# EAGLE board standalone_not_autorouted (EAGLE 6.3)
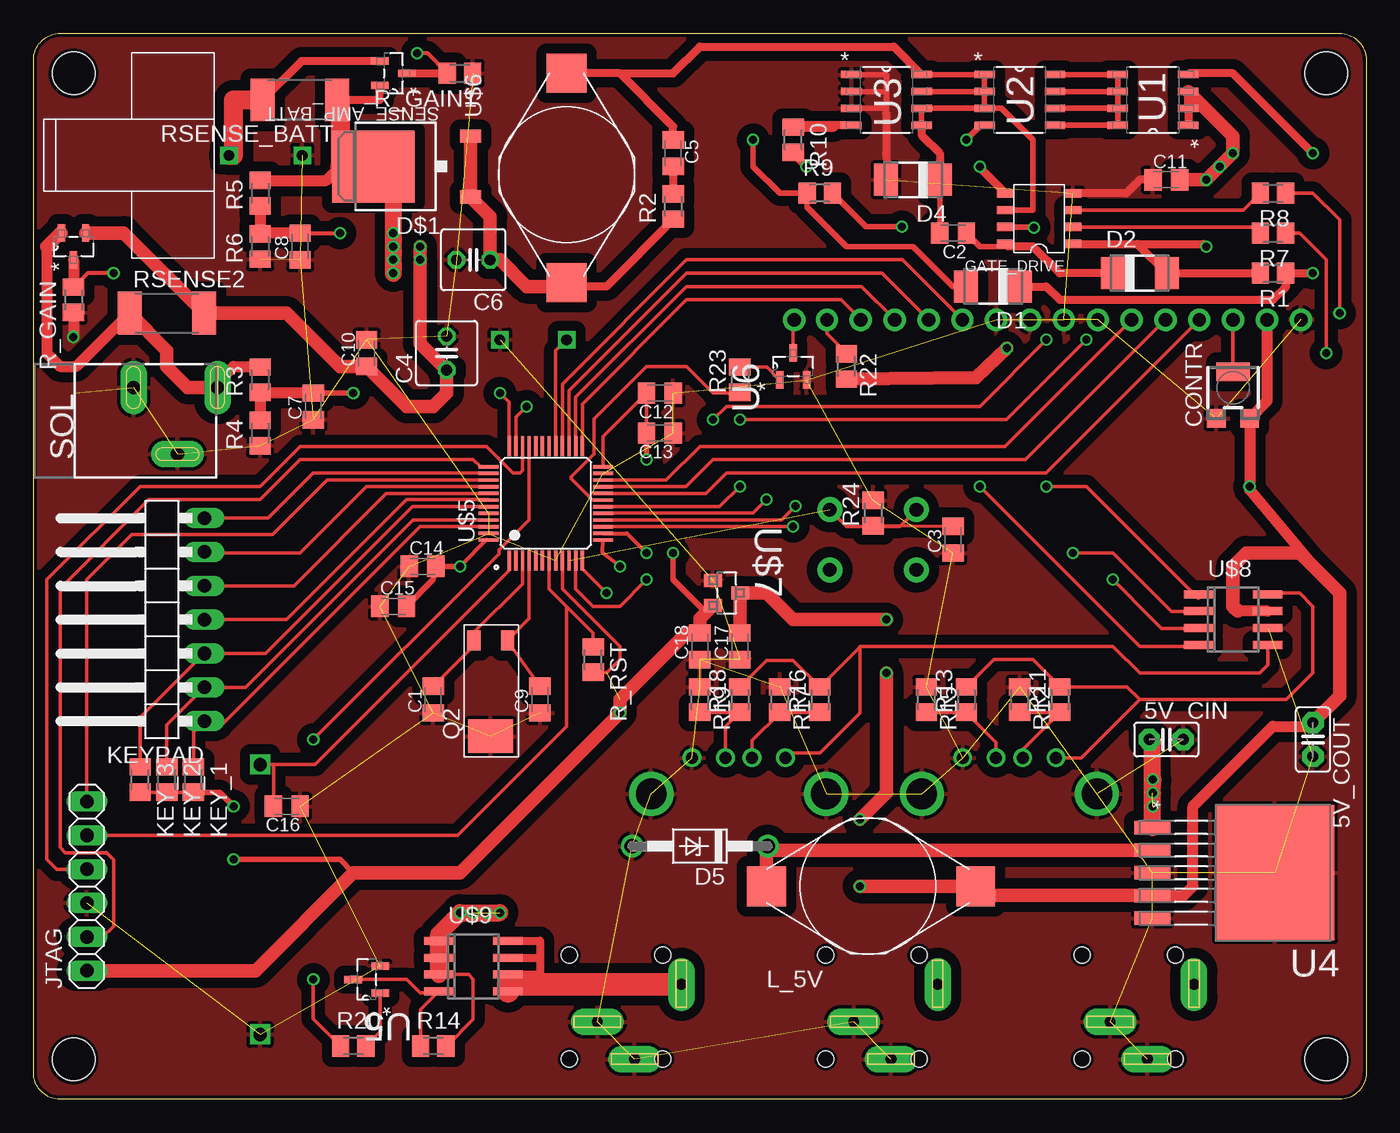
[diagram p0: board, top side]
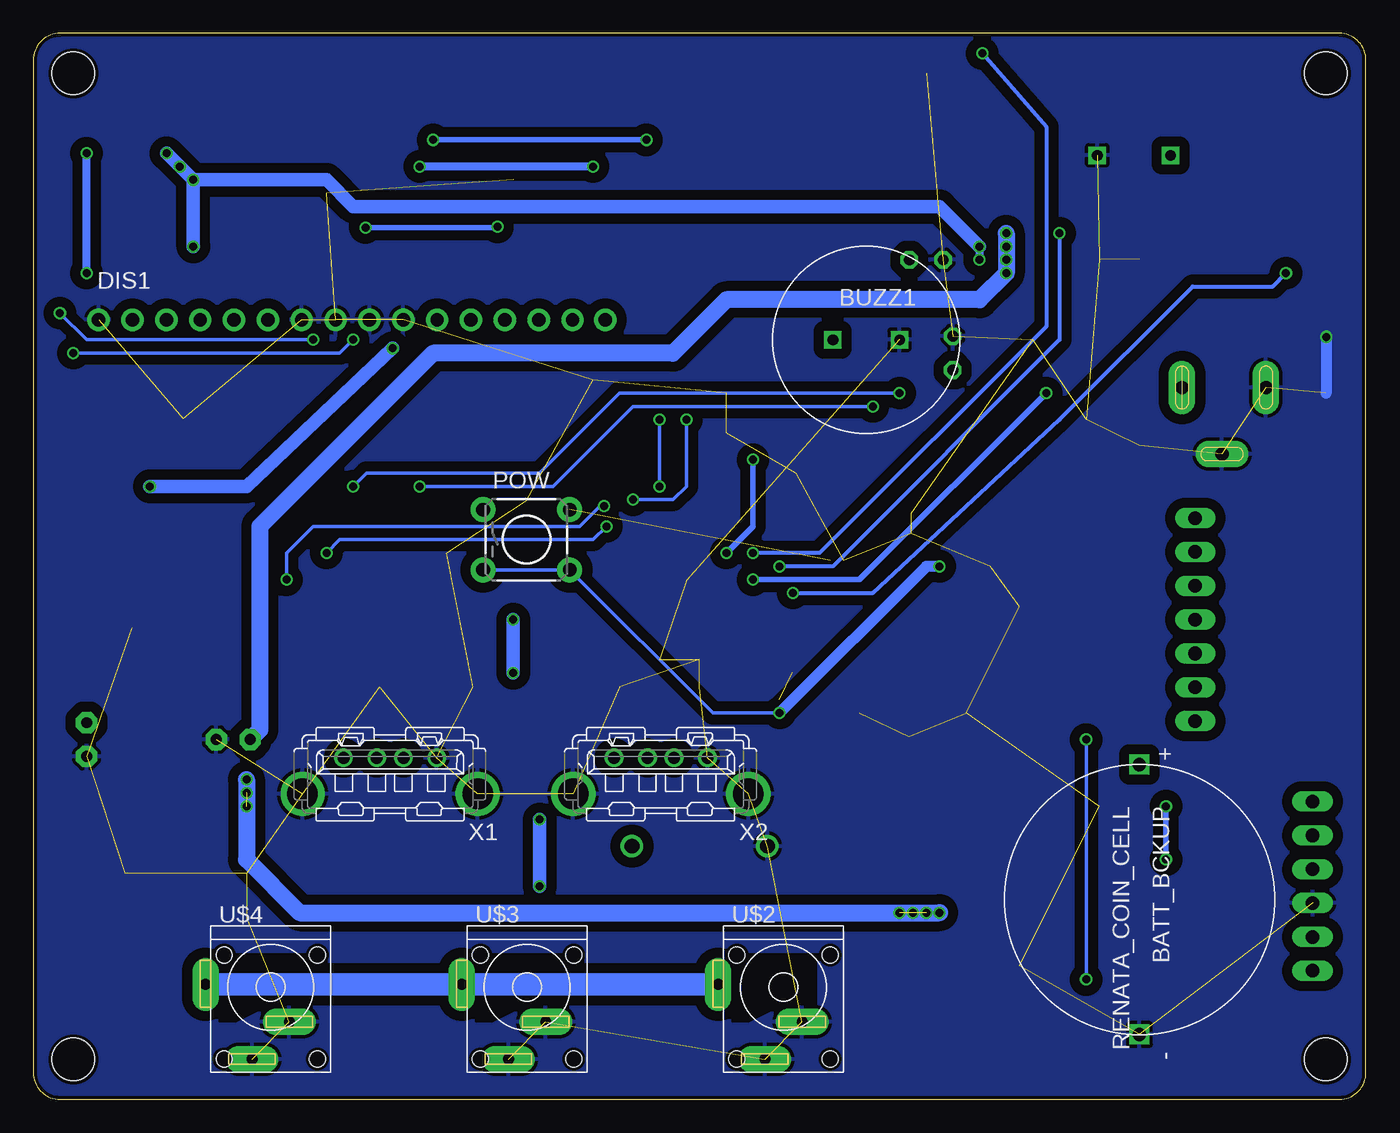
[diagram p1: board, bottom side, seen from below]

Size 100 x 80 mm. Coordinates in mm from the lower left corner, seen from the top.
Outline: 100,78 100,2 arc-90 98,0 2,0 arc-90 0,2 0,78 arc-90 2,80 98,80 arc-90 100,78
Copper layers (1*16): Top 0.035mm / dielectric 1.5mm / Bottom 0.035mm
Design rules "Fusion_eagle_rule_v1.1": minimum track width 6mil, minimum drill 12mil, track to track 6mil, track to pad 6mil, pad to pad 6mil, via to via 6mil, smd to smd 0mil, copper to edge 10mil, drill to drill 10mil, minimum pad ring 10mil, minimum via ring 6mil, stop-mask expansion 2mil, vias tented up to drill 100mil, thermal gap 10mil
Net classes: 0 default: width 0.381 mm, drill 0.61 mm, clearance 0.381 mm; 1 pwr: width 0.026 mm, drill 0.61 mm, clearance 0.762 mm; 2 pow_12v: width 1.372 mm, drill 0.762 mm, clearance 0.762 mm; 3 gnd: width 0.508 mm, drill 0.61 mm
Holes 3.2 mm at 3,77 3,3 97,3 97,77

## Footprints (pad centres in the part's own frame; a part is rotated, then mirrored left to right if it is on the bottom)
C2.5-2 = drill 0.813 pad 1.6 octagon: 1 -1.27,0; 2 1.27,0
MOLEX_39_29_1028 = drill 0.8 square: P$1 0,0; P$2 0,5.5
PANASONIC_CR2032_1298246 = drill 1 square: P+ -10.125,0; P- 10.125,0
14MM_5M_PINS = drill 0.8 square: P$1 -3,0; P$2 2,0
C0805K = smd 1.3 x 1.6: 1 -1,0; 2 1,0
C025-050X050 = drill 0.813 octagon: 1 -1.27,0; 2 1.27,0
RTRIM3304W = smd 1.4 x 1.4: 1 -1.25,-1.9; 3 1.25,-1.9 | smd 2.5 x 1.4: 2 0,1.6
DO-214AC = smd 1.8 x 2.4: A 2.025,0; C -2.025,0
DO41Z10 = drill 1.118: A 5.08,0; C -5.08,0
TO252 = smd 1 x 1.6: 1 -2.28,-4.8; 2 2.28,-4.8 | smd 5.4 x 6.2: 3 0,2.5
LCD_16X2_R2 = drill 1 pad 1.676: 1 8,2.5; 2 10.54,2.5; 3 13.08,2.5; 4 15.62,2.5; 5 18.16,2.5; 6 20.7,2.5; 7 23.24,2.5; 8 25.78,2.5; 9 28.32,2.5; 10 30.86,2.5; 11 33.4,2.5; 12 35.94,2.5; 13 38.48,2.5; 14 41.02,2.5; 15 43.56,2.5; 16 46.01,2.5
IR2104S = smd 1.27 x 0.635: 1 0,3.81; 2 0,2.54; 3 0,1.27; 4 0,0; 5 5.08,0; 6 5.08,1.27; 7 5.08,2.54; 8 5.08,3.81
1X06 = drill 1.016 long: 1 -6.35,0; 2 -3.81,0; 3 -1.27,0; 4 1.27,0; 5 3.81,0; 6 6.35,0
M0805 = smd 1.3 x 1.6: 1 -0.95,0; 2 0.95,0
1X07/90 = drill 1.016 long: 1 -7.62,-3.81; 2 -5.08,-3.81; 3 -2.54,-3.81; 4 0,-3.81; 5 2.54,-3.81; 6 5.08,-3.81; 7 7.62,-3.81
BOURNS_SDR1806 = smd 2.921 x 2.997: P$1 0,0; P$2 15.697,0
TACTILE-PTH = drill 1.016 pad 1.88: 1 -3.251,2.261; 2 3.251,2.261; 3 -3.251,-2.261; 4 3.251,-2.261
CRYSTAL_CMJ206T = smd 2.5 x 3.4: CASE -3.75,-0.3 | smd 1.5 x 1: P$2 3.45,0.97; P$3 3.45,-1.57
R2512 = smd 1.8 x 3.2: 1 -2.8,0; 2 2.8,0
SOT91P240X110-3N = smd 1.321 x 0.559: 1 -1.016,0; 2 1.016,-0.914; 3 1.016,0.914
POWER_JACK_SLOT = drill 1 pad 2 long: GND@1 2.58,7.5; GND@2 7.58,10.8; PWR 2.58,13.8
SOIC127P600X175-8N = smd 1.524 x 0.559: 1 -2.642,1.905; 2 -2.642,0.635; 3 -2.642,-0.635; 4 -2.642,-1.905; 5 2.642,-1.905; 6 2.642,-0.635; 7 2.642,0.635; 8 2.642,1.905
TO170P1435X465-6N = smd 1.016 x 2.692: 1 -3.404,-9.042; 2 -1.702,-9.042; 3 0,-9.042; 4 1.702,-9.042; 5 3.404,-9.042 | smd 10.16 x 8.941: 6 0,0.152
SOT103P240X110-3N = smd 1.321 x 0.559: 1 -1.016,1.016; 2 -1.016,-1.016; 3 1.016,0
KYCON_KLVDX_2020_B = drill 0.813 pad 2 long: 1 -4.845,0.25; 2 -1.345,-5.35; 3 1.455,-2.55 | hole 1.2: 3.555,-5.35; -3.445,-5.35; 3.555,2.45; -3.445,2.45
LQFP48 = smd 1.5 x 0.25: 1 -4.3,2.75; 2 -4.3,2.25; 3 -4.3,1.75; 4 -4.3,1.25; 5 -4.3,0.75; 6 -4.3,0.25; 7 -4.3,-0.25; 8 -4.3,-0.75; 9 -4.3,-1.25; 10 -4.3,-1.75; 11 -4.3,-2.25; 12 -4.3,-2.75; 25 4.3,-2.75; 26 4.3,-2.25; 27 4.3,-1.75; 28 4.3,-1.25; 29 4.3,-0.75; 30 4.3,-0.25; 31 4.3,0.25; 32 4.3,0.75; 33 4.3,1.25; 34 4.3,1.75; 35 4.3,2.25; 36 4.3,2.75 | smd 0.25 x 1.5: 13 -2.75,-4.3; 14 -2.25,-4.3; 15 -1.75,-4.3; 16 -1.25,-4.3; 17 -0.75,-4.3; 18 -0.25,-4.3; 19 0.25,-4.3; 20 0.75,-4.3; 21 1.25,-4.3; 22 1.75,-4.3; 23 2.25,-4.3; 24 2.75,-4.3; 37 2.75,4.3; 38 2.25,4.3; 39 1.75,4.3; 40 1.25,4.3; 41 0.75,4.3; 42 0.25,4.3; 43 -0.25,4.3; 44 -0.75,4.3; 45 -1.25,4.3; 46 -1.75,4.3; 47 -2.25,4.3; 48 -2.75,4.3
SOT95P237X112-3N = smd 0.991 x 1.321: 1 -0.94,-1.016; 2 0.94,-1.016; 3 0,1.016
SO8 = smd 0.6 x 2.2: 1 -1.905,-2.6; 2 -0.635,-2.6; 3 0.635,-2.6; 4 1.905,-2.6; 5 1.905,2.6; 6 0.635,2.6; 7 -0.635,2.6; 8 -1.905,2.6
KUSBVX = drill 0.9 pad 1.3: 1 3.5,0; 2 1,0; 3 -1,0; 4 -3.5,0 | drill 2.3 pad 2.8: M1 -6.57,2.71; M2 6.57,2.71

## Placement (x,y rotation side)
5V_CIN  100u  [C2.5-2]  85,27 0 top
5V_COUT  330u  [C2.5-2]  96,27 270 top
BATT  CON_MOLEX_39_29_1028  [MOLEX_39_29_1028]  14.66,70.84 270 top
BATT_BCKUP  RENATA_COIN_CELL  [PANASONIC_CR2032_1298246]  17,15 270 bottom
BUZZ1  BUZZ_14MM  [14MM_5M_PINS]  37,57 0 bottom
C1  12.5pF  [C0805K]  30,30 90 top
C2  1uF  [C0805K]  69,65 180 top
C3  100nF  [C0805K]  69,42 90 top
C4  100uF  [C025-050X050]  31,56 90 top
C5  0.1uF  [C0805K]  48,71 270 top
C6  220uF  [C025-050X050]  33,63 180 top
C7  0.1uF  [C0805K]  21,52 90 top
C8  0.1uF  [C0805K]  20,64 90 top
C9  12.5pF  [C0805K]  38,30 90 top
C10  1uF  [C0805K]  25,56 90 top
C11  1uF  [C0805K]  85,69 0 top
C12  1uF  [C0805K]  47,53 180 top
C13  100nF  [C0805K]  47,50 180 top
C14  100nF  [C0805K]  29.19,40 0 top
C15  100nF  [C0805K]  27,37 0 top
C16  1uF  [C0805K]  19,22 180 top
C17  1uF  [C0805K]  53,34 90 top
C18  1uF  [C0805K]  50,34 90 top
CONTR  10K  [RTRIM3304W]  90,53 0 top
D1  S1A-E3/5AT  [DO-214AC]  72,61 180 top
D2  S1A-E3/5AT  [DO-214AC]  83,62 0 top
D4  US1D - 1625280  [DO-214AC]  66,69 180 top
D5  [DO41Z10]  50,19 180 top
D$1  [TO252]  28,70 90 top
DIS1  LCD_16X2_R2  [LCD_16X2_R2]  103.1,56 0 bottom
GATE_DRIVE  IR2104S  [IR2104S]  78,68 180 top
JTAG  [1X06]  4,16 90 top
KEY_1  10K  [M0805]  12,24 270 top
KEY_2  10K  [M0805]  10,24 270 top
KEY_3  10K  [M0805]  8,24 270 top
KEYPAD  [1X07/90]  9,36 90 top
L_5V  330uF  [BOURNS_SDR1806]  55,16 0 top
POW  [TACTILE-PTH]  63,42 0 bottom
Q2  32.768khz  [CRYSTAL_CMJ206T]  34,31 90 top
R1  470K  [M0805]  93,62 180 top
R2  200  [M0805]  48,67 90 top
R3  10K  [M0805]  17,54 90 top
R4  1.32k  [M0805]  17,50 90 top
R5  10K  [M0805]  17,68 90 top
R6  1.32k  [M0805]  17,64 90 top
R7  200  [M0805]  93,65 180 top
R8  200  [M0805]  93,68 180 top
R9  5  [M0805]  59,68 0 top
R10  5  [M0805]  57,72 270 top
R11  75k  [M0805]  77,30 90 top
R12  49.9k  [M0805]  74,30 270 top
R13  75k  [M0805]  70,30 90 top
R14  100K  [M0805]  30,4 0 top
R15  49.9k  [M0805]  67,30 270 top
R16  75k  [M0805]  59,30 90 top
R17  49.9k  [M0805]  56,30 270 top
R18  75k  [M0805]  53,30 90 top
R19  49.9k  [M0805]  50,30 270 top
R20  1k  [M0805]  24,4 0 top
R22  0R  [M0805]  61,55 270 top
R23  1k  [M0805]  53,54 90 top
R24  1k  [M0805]  63,44 90 top
R_GAIN  10K  [M0805]  3,60 90 top
R_GAIN1  10K  [M0805]  32,77 180 top
R_RST  100K  [M0805]  42,33 270 top
RSENSE2  0.005  [R2512]  10,59 0 top
RSENSE_BATT  0.005  [R2512]  20,75 180 top
SENSE_AMP_BATT  ZXCT1107SA-7  [SOT91P240X110-3N]  27,77 180 top
SENSE_AMP_SOL  ZXCT1107SA-7  [SOT91P240X110-3N]  3,64 90 top
SOL  POWER_JACK_2.1MMSLT  [POWER_JACK_SLOT]  0,56 270 top
U1  DMS3016SSS-13  [SOIC127P600X175-8N]  84,75 180 top
U2  DMS3016SSS-13  [SOIC127P600X175-8N]  74,75 0 top
U3  DMS3016SSS-13  [SOIC127P600X175-8N]  64,75 0 top
U4  LM2575S-15  [TO170P1435X465-6N]  93,17 270 top
U5  NMOS_2N7002  [SOT103P240X110-3N]  25,9 180 top
U6  NMOS_2N7002  [SOT103P240X110-3N]  57,55 90 top
U$1  EQUINOX_LOGO_LARGE  [EQUINOX_LOGO_LARGE]  28.29,16.87 0 top
U$2  KYCON_KLDVX-0202  [KYCON_KLVDX_2020_B]  43.76,8.37 0 bottom
U$3  KYCON_KLDVX-0202  [KYCON_KLVDX_2020_B]  63,8.37 0 bottom
U$4  KYCON_KLDVX-0202  [KYCON_KLVDX_2020_B]  82.24,8.37 0 bottom
U$5  STM32F050C6T6A  [LQFP48]  38.44,44.72 90 top
U$6  330uF  [BOURNS_SDR1806]  40,77 270 top
U$7  MCP1700T-3302E/TT  [SOT95P237X112-3N]  52,38 270 top
U$8  AP1212  [SO8]  90,36 270 top
U$9  PMOS_RSS090P03  [SO8]  33,10 270 top
X1  KUSBVX  [KUSBVX]  73.23,25.63 180 bottom
X2  KUSBVX  [KUSBVX]  52.92,25.63 180 bottom

## Library data of the parts
5V_CIN 5V_COUT = capacitor-wima; AUTHOR: Ashley Grealish; VERSION: 0.1
BATT D$1 GATE_DRIVE POW Q2 SOL U$1-U$5 U$8 = equinox
BATT_BCKUP = coin_cells
BUZZ1 = buzzer; AUTHOR: Ashley Grealish; VERSION: 0.1
C1 C3 C9 C12-C18 R22-R24 = resistor; AUTHOR: Ashley Grealish; VERSION: 0.1
C2 C4-C8 C10 C11 CONTR R11-R13 R15-R19 = resistor
D1 D2 D4 = diode
D5 = diode; AUTHOR: Ashley Grealish; VERSION: 0.1
DIS1 = equinox; OC_FARNELL: unknown; OC_NEWARK: unknown
JTAG KEYPAD = pinhead
KEY_1-KEY_3 R14 R20 R_RST = rcl; AUTHOR: Ashley Grealish; VERSION: 0.1
L_5V = lib; AUTHOR: Ashley Grealish; VERSION: 0.1
R1-R10 R_GAIN R_GAIN1 RSENSE2 RSENSE_BATT = rcl
SENSE_AMP_BATT SENSE_AMP_SOL = equinox; MPN: ZXCT1107SA-7; OC_FARNELL: 1904027; OC_NEWARK: 55T4047; PACKAGE: SOT-23-3; SUPPLIER: DIODES INC.
U1-U3 = equinox; MPN: DMS3016SSS-13; OC_FARNELL: 1863729; OC_NEWARK: 27T2704; PACKAGE: SOIC-8; SUPPLIER: DIODES INC.
U4 = equinox; MPN: LM2575S-15; OC_FARNELL: 1798356; OC_NEWARK: 75R2093; PACKAGE: TO-263-5; SUPPLIER: National
U5 = equinox; MPN: 2N7002-7-F; OC_FARNELL: 1713823; OC_NEWARK: 25R5679; PACKAGE: SOT-23-3; SUPPLIER: DIODES INC.
U6 = equinox; AUTHOR: Ashley Grealish; MPN: 2N7002-7-F; OC_FARNELL: 1713823; OC_NEWARK: 25R5679; PACKAGE: SOT-23-3; SUPPLIER: DIODES INC.; VERSION: 0.1
U$6 = lib
U$7 = equinox; MPN: MCP1700T-3302E/TT; OC_FARNELL: 1296592; OC_NEWARK: 88H9817; PACKAGE: SOT23-3; SUPPLIER: Microchip
U$9 = equinox; FARNELL: 1525544
X1 X2 = con-kycon

## Nets
12V_OUT [pow_12v]: U$2.1 U$3.1 U$4.1 U$9.5 U$9.6 U$9.7 U$9.8
12V_OUT_EN: R20.1 U$5.33
+3V3: C12.2 C13.2 C14.2 C15.2 C18.2 JTAG.1 KEY_1.2 KEY_2.2 KEY_3.2 POW.3 POW.4 R_RST.2 U$5.9 U$5.24 U$5.48 U$7.2
+5V: 5V_COUT.1 C17.2 CONTR.3 DIS1.2 L_5V.P$2 R22.2 U4.4 U$7.3 U$8.7
BATT_I: R_GAIN1.2 SENSE_AMP_BATT.1 U$5.14
BATT_V: C8.2 R5.1 R6.2 U$5.13
CC_PWM: R7.1 U$5.17
CC_~EN: R8.1 U$5.18
GND [pwr]: 5V_CIN.2 5V_COUT.2 BATT.P$2 BATT_BCKUP.P- BUZZ1.P$2 C1.1 C3.1 C4.2 C6.2 C7.1 C8.1 C9.1 C10.2 C11.1 C12.1 C13.1 C14.1 C15.1 C16.1 C17.1 C18.1 CONTR.1 D4.A D5.A DIS1.1 DIS1.7 DIS1.8 DIS1.9 DIS1.10 GATE_DRIVE.4 JTAG.3 Q2.CASE R4.1 R6.1 R12.1 R15.1 R17.1 R19.1 R24.2 R_GAIN1.1 R_GAIN.1 SOL.GND@1 SOL.GND@2 U3.1 U3.2 U3.3 U4.3 U4.5 U4.6 U5.2 U6.2 U$2.2 U$2.3 U$3.2 U$3.3 U$4.2 U$4.3 U$5.8 U$5.23 U$5.44 U$5.47 U$7.1 U$8.6 X1.4 X1.M1 X1.M2 X2.4 X2.M1 X2.M2
LCD_BK_EN: R23.1 U$5.19
LCD_D4: DIS1.11 U$5.28
LCD_D5: DIS1.12 U$5.27
LCD_D6: DIS1.13 U$5.26
LCD_D7: DIS1.14 U$5.25
LCD_E: DIS1.6 U$5.22
LCD_RS: DIS1.4 U$5.20
LCD_RW: DIS1.5 U$5.21
N$1: C1.2 Q2.P$2 U$5.3
N$2: CONTR.2 DIS1.3
N$3: GATE_DRIVE.3 R8.2
N$4 [pwr]: BATT.P$1 RSENSE_BATT.2 SENSE_AMP_BATT.2
N$5: D1.C R1.1 U1.4
N$6 [pwr]: C2.2 C5.1 D4.C GATE_DRIVE.6 U2.1 U2.2 U2.3 U3.5 U3.6 U3.7 U3.8 U$6.P$1
N$7: GATE_DRIVE.7 R9.2
N$8: GATE_DRIVE.2 R7.2
N$9 [pwr]: C4.1 C10.1 C11.2 D2.A GATE_DRIVE.1 R1.2 RSENSE2.2 SENSE_AMP_SOL.2 U1.1 U1.2 U1.3
N$10: C2.1 D2.C GATE_DRIVE.8
N$11: R10.1 U3.4
N$12: C6.1 D$1.1 D$1.2 R2.1 U$6.P$2
N$13: GATE_DRIVE.5 R10.2
N$14: D1.A R9.1 U2.4
N$15: C5.2 R2.2
N$16 [pwr]: R3.2 RSENSE2.1 SENSE_AMP_SOL.3 SOL.PWR
N$17 [pwr]: U1.5 U1.6 U1.7 U1.8 U2.5 U2.6 U2.7 U2.8
N$18: C9.2 Q2.P$3 U$5.4
N$19: DIS1.15 R22.1
N$20: R16.1 R17.2 X2.2
N$21: D5.C L_5V.P$1 U4.2
N$22: BUZZ1.P$1 U$5.29
N$23: KEY_1.1 KEYPAD.1 U$5.46
N$24: KEY_2.1 KEYPAD.2 U$5.45
N$25: R14.1 U5.3 U$9.4
N$26: KEY_3.1 KEYPAD.3 U$5.43
N$27: KEYPAD.4 U$5.42
N$28: KEYPAD.5 U$5.41
N$29: KEYPAD.6 U$5.40
N$30: KEYPAD.7 U$5.38
N$31: DIS1.16 U6.3
N$32: R23.2 U6.1
N$33: R11.1 R12.2 X1.2
N$34: R13.1 R15.2 X1.3
N$35: R20.2 U5.1
N$36: R18.1 R19.2 X2.3
NRST: JTAG.5 R_RST.1 U$5.7
SOL_I: R_GAIN.2 SENSE_AMP_SOL.1 U$5.12
SOL_V: C7.2 R3.1 R4.2 U$5.11
SWCLK: JTAG.2 U$5.37
SWDIO: JTAG.4 U$5.34
SWO: JTAG.6 U$5.39
USART1_RX: U$5.31
USART1_TX: U$5.30
USB_EN1: U$5.36 U$8.1
USB_EN2: U$5.35 U$8.4
USB_FLG1: U$5.15 U$8.2
USB_FLG2: U$5.16 U$8.3
USB_OUT1 [pwr]: R11.2 R13.2 U$8.8 X1.1
USB_OUT2 [pwr]: R16.2 R18.2 U$8.5 X2.1
V_BACKUP: BATT_BCKUP.P+ C16.2 U$5.1
V_LOAD: 5V_CIN.1 D$1.3 R5.2 R14.2 RSENSE_BATT.1 SENSE_AMP_BATT.3 U4.1 U$9.1 U$9.2 U$9.3
WKUP: C3.2 POW.1 POW.2 R24.1 U$5.10

## Tracks (layer width: path | path; a pad name or v marks a point on that pad's centre or on a via)
12V_OUT
  Top 0.61: U$9.6 38,9.37 | U$9.7 38,10.63 | 38,10.63 38,9.37 | U$9.8 38,11.9 38,10.63 | 38,9.37 38,8.62
  Top 1.676: U$2.1 38,8.62 35.6,8.62 U$9.5
  Bottom 1.676: U$2.1 U$3.1 U$4.1
12V_OUT_EN  (via drill 0.6)
  Top 0.254: U$5.33 37.19,43.46 34.94,41.21 34.94,40.94 v21,27 | v21,9 21,6.05 R20.1
  Bottom 0.254: v21,27 v21,9
+3V3  (via drill 0.6)  (1 unrouted)
  Top 0.254: U$5.48 33.97,41.97 34,42 | C12.2 42.74,49.75 U$5.24 42.74,49.74 C12.2 | R_RST.2 43.05,32.05 44,33 44,34 39.69,38.31 U$5.9 | KEY_3.2 KEY_2.2 KEY_1.2 | C12.2 C13.2
  Top 0.305: 34,42 v32,40
  Top 0.406: KEY_1.2 13.95,23.05 v15,22 | v15,18 23,18 24,17 | v32,40 C14.2 30,39 C15.2 | C13.2 v46,48 | v48,41 48,39 50.46,36.54
  Top 1.016: JTAG.1 16.65,9.65 24,17 32,17 v44,29 44,30 49,35 C18.2 50,36.08 50.46,36.54 U$7.2
  Bottom 0.254: v44,29 49.01,29 POW.4 POW.3
  Bottom 0.406: v15,22 v15,18 | v46,48 46,43 v48,41
  Bottom 0.813: v32,40 33,40 v44,29
+5V  (via drill 0.6)
  Top 0.254: 95.73,28 5V_COUT.1
  Top 0.813: U$8.7 90.36,36.63 | U4.4 86.3,15.3 87,16 87,22 93,28 95.73,28 | DIS1.2 92.56,52.41 CONTR.3 v91.25,46 91.25,45.75 96.5,39.5
  Top 1.016: U4.4 70.7,15.3 L_5V.P$2 v62,16 | 90.36,36.63 90,37 90,40 91,41 95,41 96.5,39.5 98,38 98,30.27 5V_COUT.1 | R22.2 70.7,54.15 v73.03,56.36 | C17.2 53.02,35.02 U$7.3 55,38 57,36 v64,36 | v64,32 64,23 v62,21
  Bottom 1.016: v73.03,56.36 84,46 v91.25,46 | v64,36 v64,32 | v62,21 v62,16
BATT_I  (via drill 0.6)
  Top 0.305: R_GAIN1.2 29.56,78.5 v28.79,78.49 | v46,41 44.53,42.47 U$5.14
  Top 0.61: SENSE_AMP_BATT.1 R_GAIN1.2
  Bottom 0.305: v28.79,78.49 24,73 24,58 41,41 v46,41
BATT_V  (via drill 0.6)
  Top 0.305: C8.2 v23,65 | v44,40 42.71,41 U$5.13
  Top 0.813: R5.1 R6.2 17.05,65 C8.2
  Bottom 0.305: v23,65 23,57 40,40 v44,40
CC_PWM  (via drill 0.6)
  Top 0.254: R7.1 95,65 97,63 v97,56 | v76,57 71,52 52,52 v51,51 | v55,45 54,44 42.77,44 U$5.17
  Bottom 0.254: v97,56 77,56 v76,57 | v51,51 51,46 52,45 v55,45
CC_~EN  (via drill 0.6)
  Top 0.254: U$5.18 51.47,44.47 v53,46 | v53,51 73,51 v79,57 | v98,59 98,66 96,68 R8.1
  Bottom 0.254: v53,46 v53,51 | v79,57 96,57 v98,59
GND  (via drill 0.6)  (64 unrouted)
  Top 0.406: U3.1 64,76.91 64,75.64 | 64,74.36 64,74 | U3.2 64,75.64 | U3.3 64,74.36 | 64,74.36 64,75.64
  Top 0.61: 64,74 64,71 64.03,70 D4.A | C11.1 83,69 82,68 GATE_DRIVE.4
  Top 0.813: R_GAIN.1 3,57.24 v2.98,57.22
  Top 1.016: R_GAIN1.1 33,77
  Bottom 0.813: v2.98,57.22 2.98,53.02 3,53
  pour Top: 0,0 100,0 100,80 0,80
  pour Bottom: 0,0 100,0 100,80 0,80
LCD_BK_EN
  Top 0.254: U$5.19 41.95,44.97 40.32,46.6 40.32,46.7 42.06,48.44 42.06,51.06 46,55 49,55 51,53 52.95,53 R23.1
LCD_D4
  Top 0.254: U$5.28 39.69,53.69 49,63 65.2,63 DIS1.11
LCD_D5
  Top 0.254: U$5.27 40.19,53.19 49,62 63.66,62 DIS1.12
LCD_D6
  Top 0.254: U$5.26 40.69,52.69 49,61 62.12,61 DIS1.13
LCD_D7
  Top 0.254: U$5.25 41.19,52.19 49,60 60.58,60 DIS1.14
LCD_E
  Top 0.254: U$5.22 47.47,46.47 50,49 72.9,49 DIS1.6
LCD_RS
  Top 0.254: 87.5,58.5 DIS1.4 75.98,47 52,47 50.47,45.47 U$5.20
LCD_RW
  Top 0.254: U$5.21 48.97,45.97 51,48 74.44,48 DIS1.5
N$1
  Top 0.254: U$5.3 36.69,38.69 33,35 33,34.48 Q2.P$2 33.45,34.45 C1.2
N$2
  Top 0.254: CONTR.2 90,58.48 DIS1.3
N$3
  Top 0.254: GATE_DRIVE.3 90.78,66.73 R8.2
N$4
  Top 0.61: SENSE_AMP_BATT.2 20.11,77.91 RSENSE_BATT.2
  Top 1.422: BATT.P$1 15,70.84 15,75 RSENSE_BATT.2
N$5  (via drill 0.6)
  Top 0.61: D1.C 76,61 77,60 93,60 94,61 93.95,61.05 R1.1 v96,62 | v96,71 90,77 86.74,77 U1.4
  Bottom 0.61: v96,62 v96,71
N$6
  Top 0.406: U3.8 U2.1 U2.3 | U3.7 U2.2 U2.3 | U2.3 U3.6 U3.5 | GATE_DRIVE.6 75,66.73 75,72 72.64,74.36 U2.3 | C2.2 68,68.97 D4.C
  Top 0.61: U3.5 66.64,72.36 68,71 68,69.03 D4.C | 44,77 U$6.P$1 | C5.1 48,73 44,77 | 44,77 48,77 50,79 64.55,79 U3.8
N$7  (via drill 0.6)
  Top 0.406: GATE_DRIVE.7 75.05,65.46 v75.08,65.43 | v65.16,65.48 62.47,65.48 R9.2
  Bottom 0.406: v75.08,65.43 65.21,65.43 v65.16,65.48
N$8
  Top 0.254: GATE_DRIVE.2 91.59,65.46 R7.2
N$9  (via drill 0.6)
  Top 0.61: GATE_DRIVE.1 82.83,64.19 | 82.83,64.19 D2.A R1.2 | 82.83,64.19 87.81,64.19 v88,64 | U1.3 U1.2 U1.1
  Top 1.016: SENSE_AMP_SOL.2 6.78,65.02 RSENSE2.2 19,59 23,55 C10.1 28,52 30,52 31,53 C4.1 29,56.73 v29,63 v29,64 | U1.3 90,72.28 v90,71 v88,69 C11.2
  Bottom 0.61: v29,64 v29,63
  Bottom 1.016: v88,64 v88,69 | v88,69 v90,71 | v88,69 78,69 76,67 32,67 v29,64
  other vias: 89,70
N$10
  Top 0.406: C2.1 71,64 72.73,64 GATE_DRIVE.8
  Top 0.61: D2.C 77,62 75,64 73.11,64 GATE_DRIVE.8
N$11
  Top 0.61: U3.4 60.09,73.09 60,73
  Top 0.813: 60,73 57.05,73 R10.1
N$12
  Top 0.61: R2.1 48,66 43,61 40,61 U$6.P$2
  Top 1.016: U$6.P$2 39.7,61 37,61 35,63 C6.1 34.27,66.25 D$1.1 D$1.2
N$13  (via drill 0.6)
  Top 0.61: R10.2 v58,70 | v71,70 71,69.92 GATE_DRIVE.5
  Bottom 0.61: v58,70 v71,70
N$14  (via drill 0.6)
  Top 0.406: D1.A 69,61 66,64 61,64 58.05,66.95 R9.1 56,68 54,70 v54,72 | U2.4 71.09,73.09 v70,72
  Bottom 0.406: v70,72 v54,72
N$15
  Top 0.61: C5.2 R2.2
N$16
  Top 0.813: 1,64 1,56 2,55 3.2,55 RSENSE2.1 | SOL.PWR 13.8,53.8 15,55 16.95,55 R3.2
  Top 1.016: SOL.PWR 11.58,53.42 10,55 10,56.2 RSENSE2.1 | SENSE_AMP_SOL.3 2.02,65.02 1,64
N$17
  Top 0.406: U2.8 U1.5 U1.6 | U1.6 U2.7 | U2.6 U1.7 | U2.5 U1.8 U1.7 | U1.7 U1.6
N$18
  Top 0.254: U$5.4 37.19,36.07 Q2.P$3 35.55,34.45 C9.2
N$19
  Top 0.254: DIS1.15 59.54,57.46 61,56 R22.1
N$20
  Top 0.254: X2.2 53.92,26.92 56,29 56.95,29 R17.2 R16.1
N$21
  Top 1.016: U4.2 55.08,18.7 | 55.08,18.7 D5.C | 55.08,18.7 55,18.7 L_5V.P$1
N$22
  Top 0.254: U$5.29 39.19,56.19 BUZZ1.P$1
N$23
  Top 0.254: U$5.46 34.11,43 29,43 14,28 13.19,28 KEYPAD.1 12,27.57 KEY_1.1
N$24
  Top 0.254: U$5.45 28.47,43.47 15.92,30.92 KEYPAD.2 10,28.11 KEY_2.1
N$25
  Top 0.254: R14.1 29.05,6.75 U$9.4 30.3,8 29,8 28,9 U5.3
N$26
  Top 0.254: U$5.43 28.44,44.47 17.43,33.46 KEYPAD.3 8,28.65 KEY_3.1
N$27
  Top 0.254: KEYPAD.4 19,36 28,45 34.11,45 U$5.42
N$28
  Top 0.254: KEYPAD.5 19.54,38.54 26.47,45.47 U$5.41
N$29
  Top 0.254: KEYPAD.6 12.92,41.08 13,41 20,41 25,46 34.11,46 U$5.40
N$30
  Top 0.254: KEYPAD.7 17.62,43.62 21,47 34.11,47 U$5.38
N$31
  Top 0.254: U6.3 57,58.41 DIS1.16
N$32
  Top 0.254: R23.2 55.02,54.95 U6.1
N$33
  Top 0.254: X1.2 74.23,26.28 R11.1 R12.2
N$34
  Top 0.254: X1.3 72.23,26.77 70,29 69.05,29 R13.1 R15.2
N$35
  Top 0.254: U5.1 26.02,5.07 R20.2
N$36
  Top 0.254: X2.3 51.92,27.97 R18.1 R19.2
NRST
  Top 0.254: JTAG.5 31.81,19.81 40,28 40,37 | 40,37 38.69,38.31 U$5.7 | R_RST.1 42,35 40,37
SOL_I  (via drill 0.6)
  Top 0.254: U$5.12 41.19,39.81 v43,38
  Top 0.305: v6,62 4.05,62 R_GAIN.2
  Top 0.813: SENSE_AMP_SOL.1 R_GAIN.2
  Bottom 0.305: v43,38 37,38 23,51 13,61 7,61 v6,62
SOL_V  (via drill 0.6)
  Top 0.254: v46,39 44,37 42,37 40.69,38.31 U$5.11
  Top 0.406: C7.2 v24,53
  Top 0.813: R4.2 R3.1 20.95,53.05 C7.2
  Bottom 0.406: v24,53 38,39 v46,39
SWCLK
  Top 0.254: JTAG.2 5.19,12.19 6,13 6,17.96 5.44,18.52 5.43,18.51 2.39,18.51 2,18.9 2,38.35 8.63,45 17,45 20,48 33,48 33.53,47.47 U$5.37
SWDIO
  Top 0.254: JTAG.4 1.73,17.27 1,18 1,39 8,46 17,46 20,49 34,49 36,47 36.51,47 36.69,47.18 U$5.34
SWO
  Top 0.254: U$5.39 22.02,46.47 17.93,42.38 7.38,42.38 4,39 JTAG.6
USB_EN1  (via drill 0.6)
  Top 0.254: U$8.1 87.4,37.6 79,46 v76,46 | U$5.36 35.69,52.31 v35,53
  Bottom 0.254: v35,53 56,53 62,47 75,47 v76,46
USB_EN2  (via drill 0.6)
  Top 0.254: U$5.35 36.19,51.19 v37,52 | v71,46 83,34 87.31,34 U$8.4
  Bottom 0.254: v37,52 55,52 61,46 v71,46
USB_FLG1  (via drill 0.6)
  Top 0.254: U$5.15 49.97,42.97 v57,43 | v78,41 81,41 85.37,36.63 U$8.2
  Bottom 0.254: v57,43 58,42 77,42 v78,41
USB_FLG2  (via drill 0.6)
  Top 0.254: U$5.16 56.12,43.47 v57.19,44.54 | v81,39 84,35.97 84.63,35.34 87.38,35.34 U$8.3
  Bottom 0.254: v57.19,44.54 57.46,44.54 59,43 79,43 81,41 v81,39
USB_OUT1
  Top 0.254: X1.1 78.63,25.63 83,30 | 83,30 94,30 96,32 96,37 95,38 92.69,38 U$8.8 | 83,30 82.05,30.95 R11.2 77,31 75,33 72.05,33 R13.2
USB_OUT2
  Top 0.254: X2.1 56.63,25.63 57,26 59,26 62,29 62,34 62.05,34 | U$8.5 92.6,32.6 92,32 83,32 81,34 62.05,34 | 62.05,34 R16.2 57,32.95 55,32.95 R18.2
V_BACKUP
  Top 0.254: U$5.1 35.69,39.69 21.12,25.12 BATT_BCKUP.P+ 17.88,25.12 18,25 C16.2
V_LOAD  (via drill 0.6)  (3 unrouted)
  Top 0.254: U$9.3 32.63,9.37 33,9 33,6 31,4 R14.2
  Top 0.61: 23,75 25.98,75 SENSE_AMP_BATT.3
  Top 0.813: R5.2 21.95,68.95 23,70
  Top 1.27: 5V_CIN.1 83.96,26.77 U4.1 83.96,22.96 v84,24 | U$9.3 U$9.2 U$9.1 30.4,12.4 v32,14 v35,14 | D$1.3 27,68.5 v27,62
  Top 1.422: RSENSE_BATT.1 23,75 23,70 D$1.3
  Bottom 1.27: v84,24 84,18 80,14 v32,14 | v27,65 v27,62 29,60 48,60 52,56 70,56 83,43 83,27.73 5V_CIN.1
  other vias: 84,23 84,22 33,14 27,63 27,64 34,14
WKUP  (1 unrouted)
  Top 0.254: R24.1 C3.2 | POW.1 65,43 63.05,43 R24.1 | POW.2 61,43 62.95,43 R24.1

## Text on the board
Document: OUTER BOX DIMENSIONS | INNER BOX DIMENSIONS | KEYPAD